# Altium PCB PCB_2020-06-04_12-19-27_2020-06-04_19-57-05.pcbdoc
Units mil, origin at the board's own origin, x right, y up, seen from the top; angles counter-clockwise.
Board outline 4145.55 x 3155 mil, 2 copper layers (Top Layer, Bottom Layer); 9 components, 36 nets, 62 pads, 0 vias.
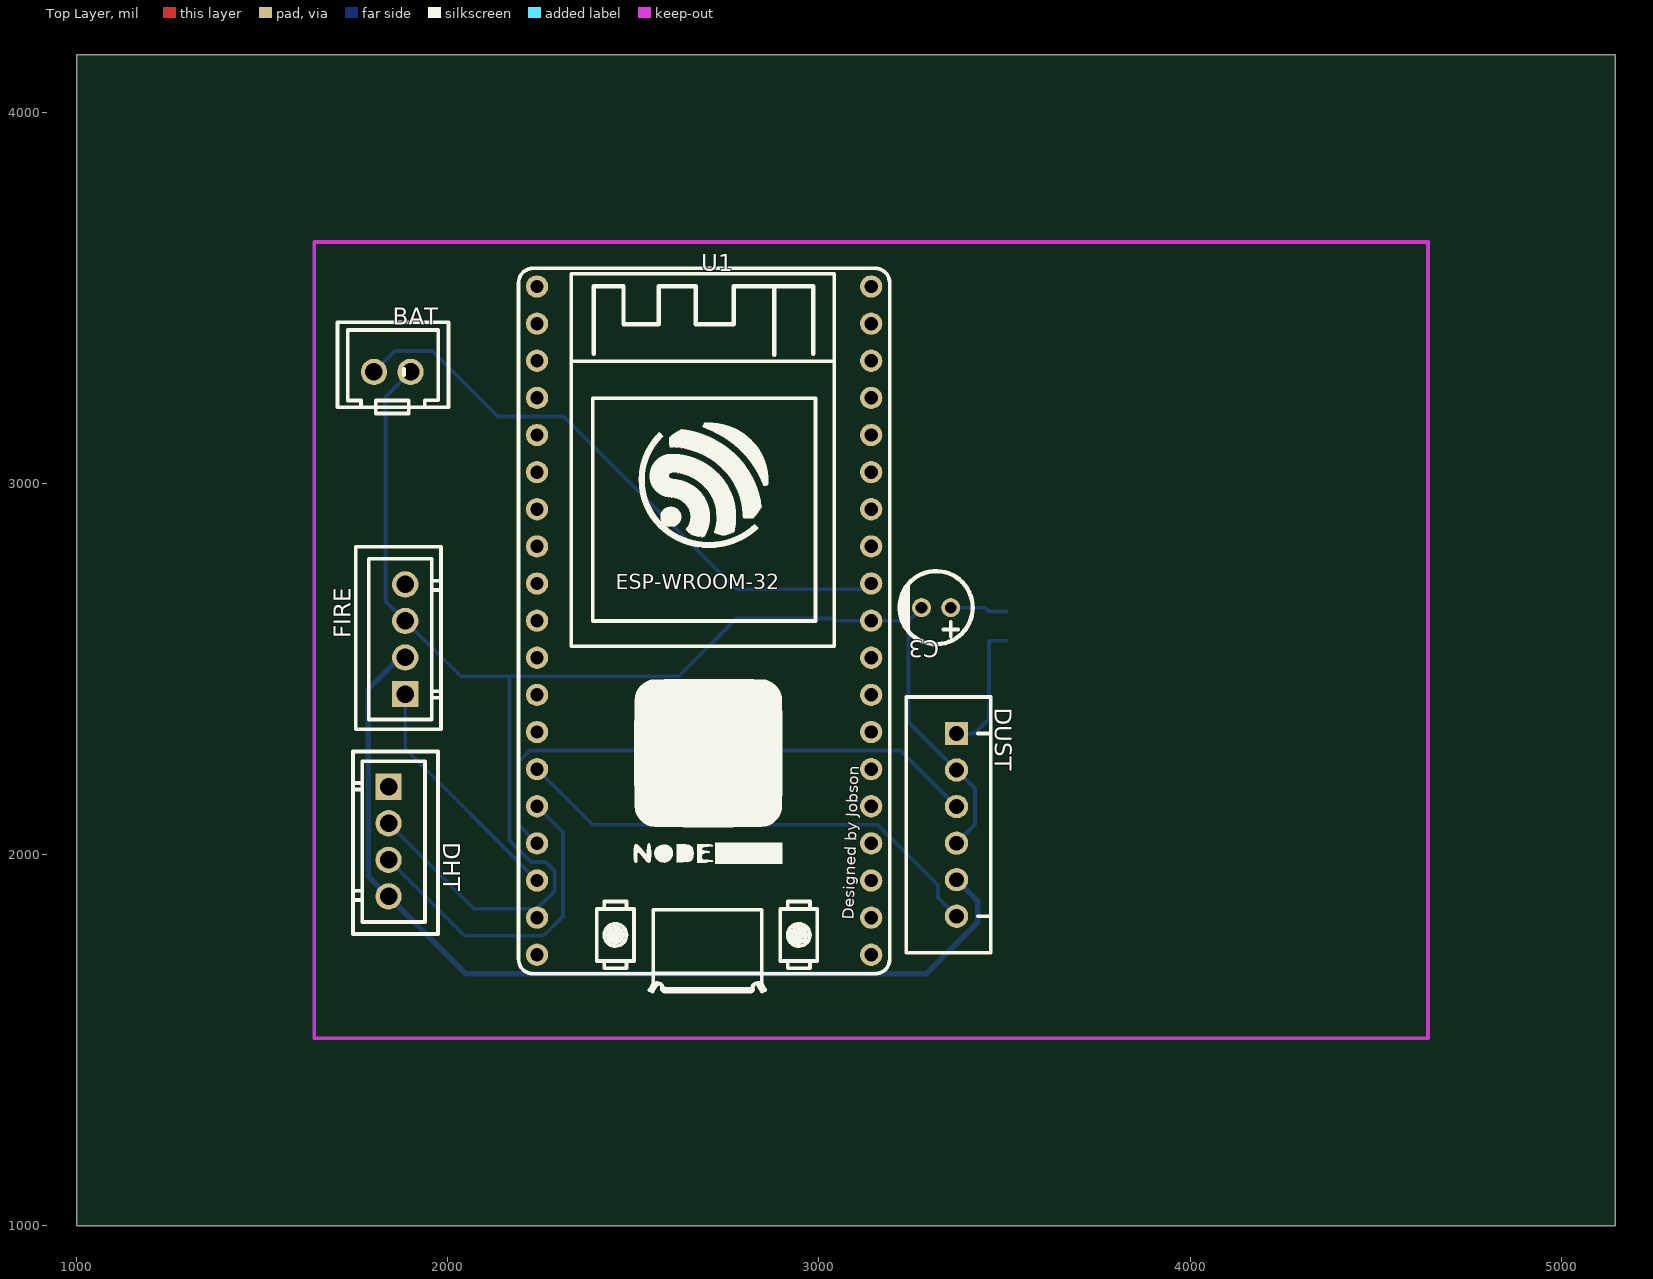
[diagram p0: Top Layer view]
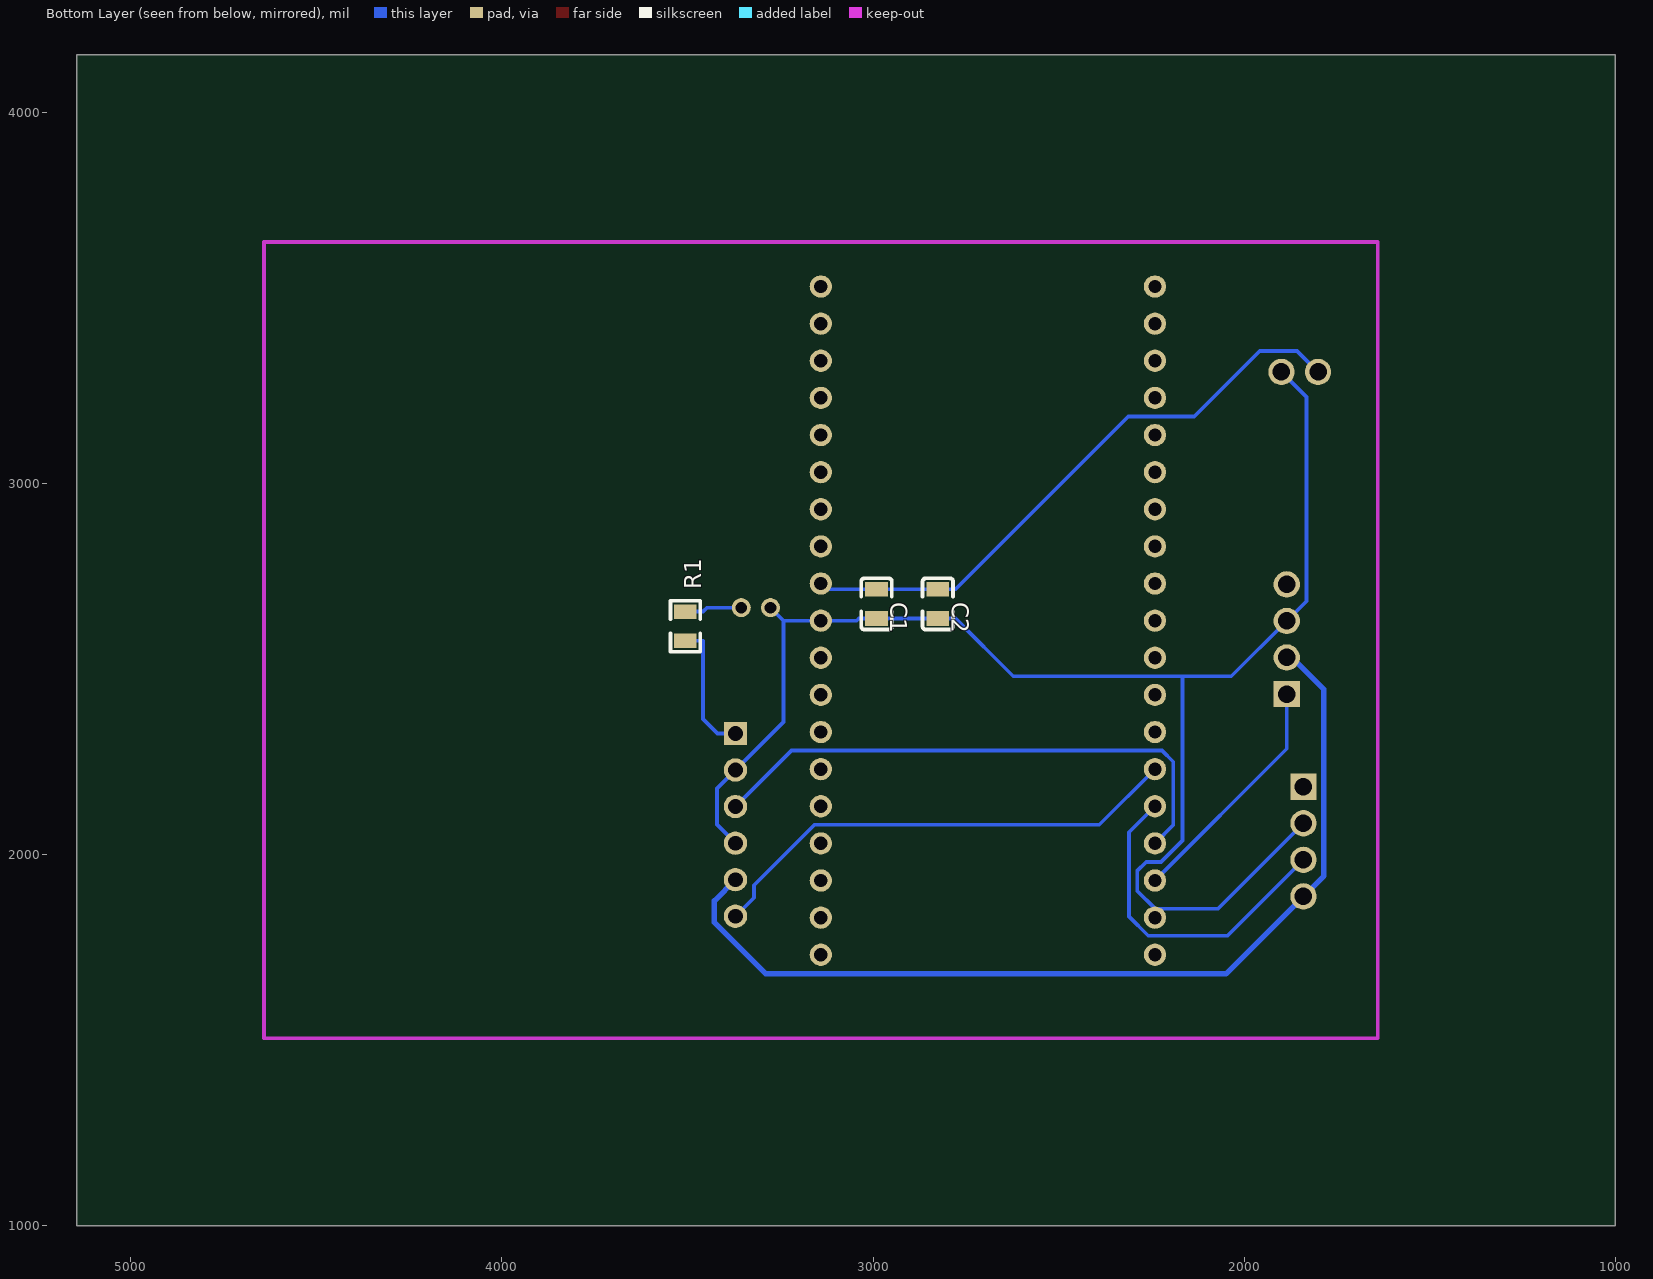
[diagram p1: Bottom Layer view, seen from below]

## Layer stack, top to bottom
Top Layer: signal copper (thickness not stored)
Dielectric: dielectric 12.6, FR-4, Dk 4.8
Bottom Layer: signal copper (thickness not stored)

## Board outline
5145.55,1000 1000,1000 1000,4155 5145.55,4155

## Components (designator, comment, footprint, x,y, rotation, side; value= is the part's Value field where it differs from the comment)
BAT "XHB-2A Connector" CONN-TH_XHB-2A 1850.55,3300 r0 top
C1 "104" C0805 2990.55,2675 r90 bottom
C2 "104" C0805 2825.55,2675 r90 bottom
C3 "47uF" CAP-TH_BD5.0-P2.00-D0.8-FD 3315.55,2665 r180 top
DHT "XH-4A" CONN-TH_4P-P2.50_XH-4A 1840.55,2035 r270 top
DUST "XH-6A" CONN-TH_6P-P2.50_XH-6A 3370.55,2080 r270 top
FIRE "XH-4A" CONN-TH_4P-P2.50_XH-4A 1885.55,2580 r90 top
R1 "1k" R0805 3505.55,2615 r270 bottom
U1 "NodeMCU-ESP32-WROOM" AI-THINKER_NODEMCU-32SLUA 2690.55,2630 r0 top

## Footprints (in the part's own frame and the unit in brackets; to place one, negate y for a bottom-side part, rotate by r counter-clockwise, add the part's x,y. Pads: shape width x height; smd on the part's side, far side on the other; paste and mask are expansions set on the pad)
AI-THINKER_NODEMCU-32SLUA [mil]
  round 60 hole 36: 1(-450,-900) 2(-450,-800) 3(-450,-700) 4(-450,-600) 5(-450,-500) 6(-450,-400) 7(-450,-300) 8(-450,-200) 9(-450,-100) 10(-450,0) 11(-450,100) 12(-450,200) 13(-450,300) 14(-450,400) 15(-450,500) 16(-450,600) 17(-450,700) 18(-450,800) 19(-450,900) 20(450,-900) 21(450,-800) 22(450,-700) 23(450,-600) 24(450,-500) 25(450,-400) 26(450,-300) 27(450,-200) 28(450,-100) 29(450,0) 30(450,100) 31(450,200) 32(450,300) 33(450,400) 34(450,500) 35(450,600) 36(450,700) 37(450,800) 38(450,900)
  silkscreen extent -500,-999 500,949
C0805 [mm]
  rect 1x1.55 smd: 1(1,0) 2(-1,0)
  silkscreen extent -1.75,-1.04 1.75,1.04
CAP-TH_BD5.0-P2.00-D0.8-FD [mm]
  round 1.3 hole 0.8: 1(-1,0) 2(1,0)
  silkscreen extent -2.5,-2.5 2.5,2.5
CONN-TH_4P-P2.50_XH-4A [mm]
  rect 1.8x1.8 hole 1.199: 1(-3.75,0)
  round 1.8 hole 1.199: 2(-1.248,0) 3(1.251,0) 4(3.75,0)
  silkscreen extent -6.17,-2.44 6.33,3.38
CONN-TH_6P-P2.50_XH-6A [mm]
  rect 1.6x1.6 hole 1: 1(-6.25,0)
  round 1.6 hole 1: 2(-3.75,0) 3(-1.25,0) 4(1.25,0) 5(3.75,0) 6(6.25,0)
  silkscreen extent -8.75,-3.45 8.75,2.35
CONN-TH_XHB-2A [mm]
  round 1.8 hole 1.199: 1(-1.251,0) 2(1.251,0)
  silkscreen extent -3.75,-2.84 3.86,3.4
R0805 [mm]
  rect 1x1.55 smd: 1(1,0) 2(-1,0)
  silkscreen extent -1.75,-1.02 1.75,1.02

## Nets (pads, with @x,y where several pads share a name; then routed paths per layer and width w, separated by ;. In a path a pad name is that pad's centre, name@x,y a point inside that pad or via, vN(x,y) a via of type N, cw(c..) or ccw(c..) an arc to the next point about the centre after c; other vN are vias at no path point)
+5V: DHT.4 DUST.5 FIRE.2 | length 2585.7
  Bottom Layer w15: FIRE.2 1871.45,2530.8 1785.55,2445 1785.55,1942.4 1840.55,1887.3 2049.45,1678.4 3288.75,1678.4 3427.55,1817.3 3427.55,1875.3 DUST.5
A0: DUST.6 U1.6 | length 1313.6
  Bottom Layer w10: U1.6 2390.55,2080 3157.85,2080 3320.75,1917.1 3320.75,1883.8 DUST.6
C1_1: BAT.1 C1.1 C2.1 U1.30 | length 1634.8
  Bottom Layer w10: BAT.1@1801.35,3300 1857.65,3356.3 1958.35,3356.3 2134.75,3180 2312.35,3180 2777.95,2714.4 C2.1 C1.1 3124.95,2714.4 U1.30
DHT_1: DHT.1
DHTSIGN: DHT.3 U1.5 | length 902.4
  Bottom Layer w10: DHT.3@1840.55,1985.7 2045.25,1781 2258.55,1781 2310.65,1833.1 2310.65,2059.9 U1.5
DUST_1: DUST.1 R1.1 | length 361.8
  Bottom Layer w10: DUST.1 3419.15,2326.1 3457.95,2364.9 3457.95,2575.6 R1.1
FIRE_4: FIRE.4
FIRESIGN: FIRE.1 U1.3 | length 649.3
  Bottom Layer w10: FIRE.1@1885.55,2432.3 1885.55,2285 U1.3
GND: BAT.2 C1.2 C2.2 C3.2 DHT.2 DUST.2 DUST.4 FIRE.3 U1.2 U1.29 | length 4187.6
  Bottom Layer w10: DHT.2@1840.55,2084.1 2070.35,1854.3 U1.2@2240.55,1854.3 ; BAT.2@1899.85,3300 1832.55,3232.7 1832.55,2682.2 FIRE.3 2034.85,2480 2166.35,2480 ; U1.2 U1.2@2240.55,1854.3 ; C3.2 3241.15,2630 ; DUST.4 3420.35,2080.6 3420.35,2177.8 DUST.2 3241.15,2357 3241.15,2630 ; 2166.35,2480 2622.35,2480 2777.95,2635.6 C2.2 C1.2 3038.15,2635.6 3043.75,2630 U1.29 3241.15,2630 ; 2166.35,2480 2166.35,2037.6 2223.95,1980 2264.25,1980 2288.55,1955.7 2288.55,1902.3 U1.2@2240.55,1854.3
LED: DUST.3 U1.4 | length 1494.3
  Bottom Layer w10: U1.4 2191.35,2079.2 2191.35,2249.7 2221.65,2280 3219.75,2280 DUST.3
R1_2: C3.1 R1.2 | length 155
  Bottom Layer w10: C3.1@3354.95,2665 3447.35,2665 3457.95,2654.4 R1.2
S$140: 
S$142: 
U1_1: U1.1
U1_7: U1.7
U1_8: U1.8
U1_9: U1.9
U1_10: U1.10
U1_11: U1.11
U1_12: U1.12
U1_13: U1.13
U1_14: U1.14
U1_15: U1.15
U1_16: U1.16
U1_17: U1.17
U1_18: U1.18
U1_19: U1.19
U1_20: U1.20
U1_21: U1.21
U1_22: U1.22
U1_23: U1.23
U1_24: U1.24
U1_25: U1.25
U1_26: U1.26
U1_27: U1.27
U1_28: U1.28
pads on no net: U1.31 U1.32 U1.33 U1.34 U1.35 U1.36 U1.37 U1.38

## Silkscreen, mask and mechanical layers (free items; w line width, h text height)
Document:
  lines w0.1: 3071.78,2576.5 3073.78,2578.5

## Text inside footprints (layer, text, board x,y; h text height)
U1: Top Overlay "ESP-WROOM-32" at 2452.55,2714 h40; Top Overlay "Designed by Jobson" at 3094.24,1824.68 h30 r88